# Altium PCB PCB1.PcbDoc (part 1 of 2)
Units mil, origin at the board's own origin, x right, y up, seen from the top; angles counter-clockwise.
Board outline 2362.2 x 2362.2 mil, 2 copper layers (Top Layer, Bottom Layer); 150 components, 103 nets, 538 pads, 377 vias.
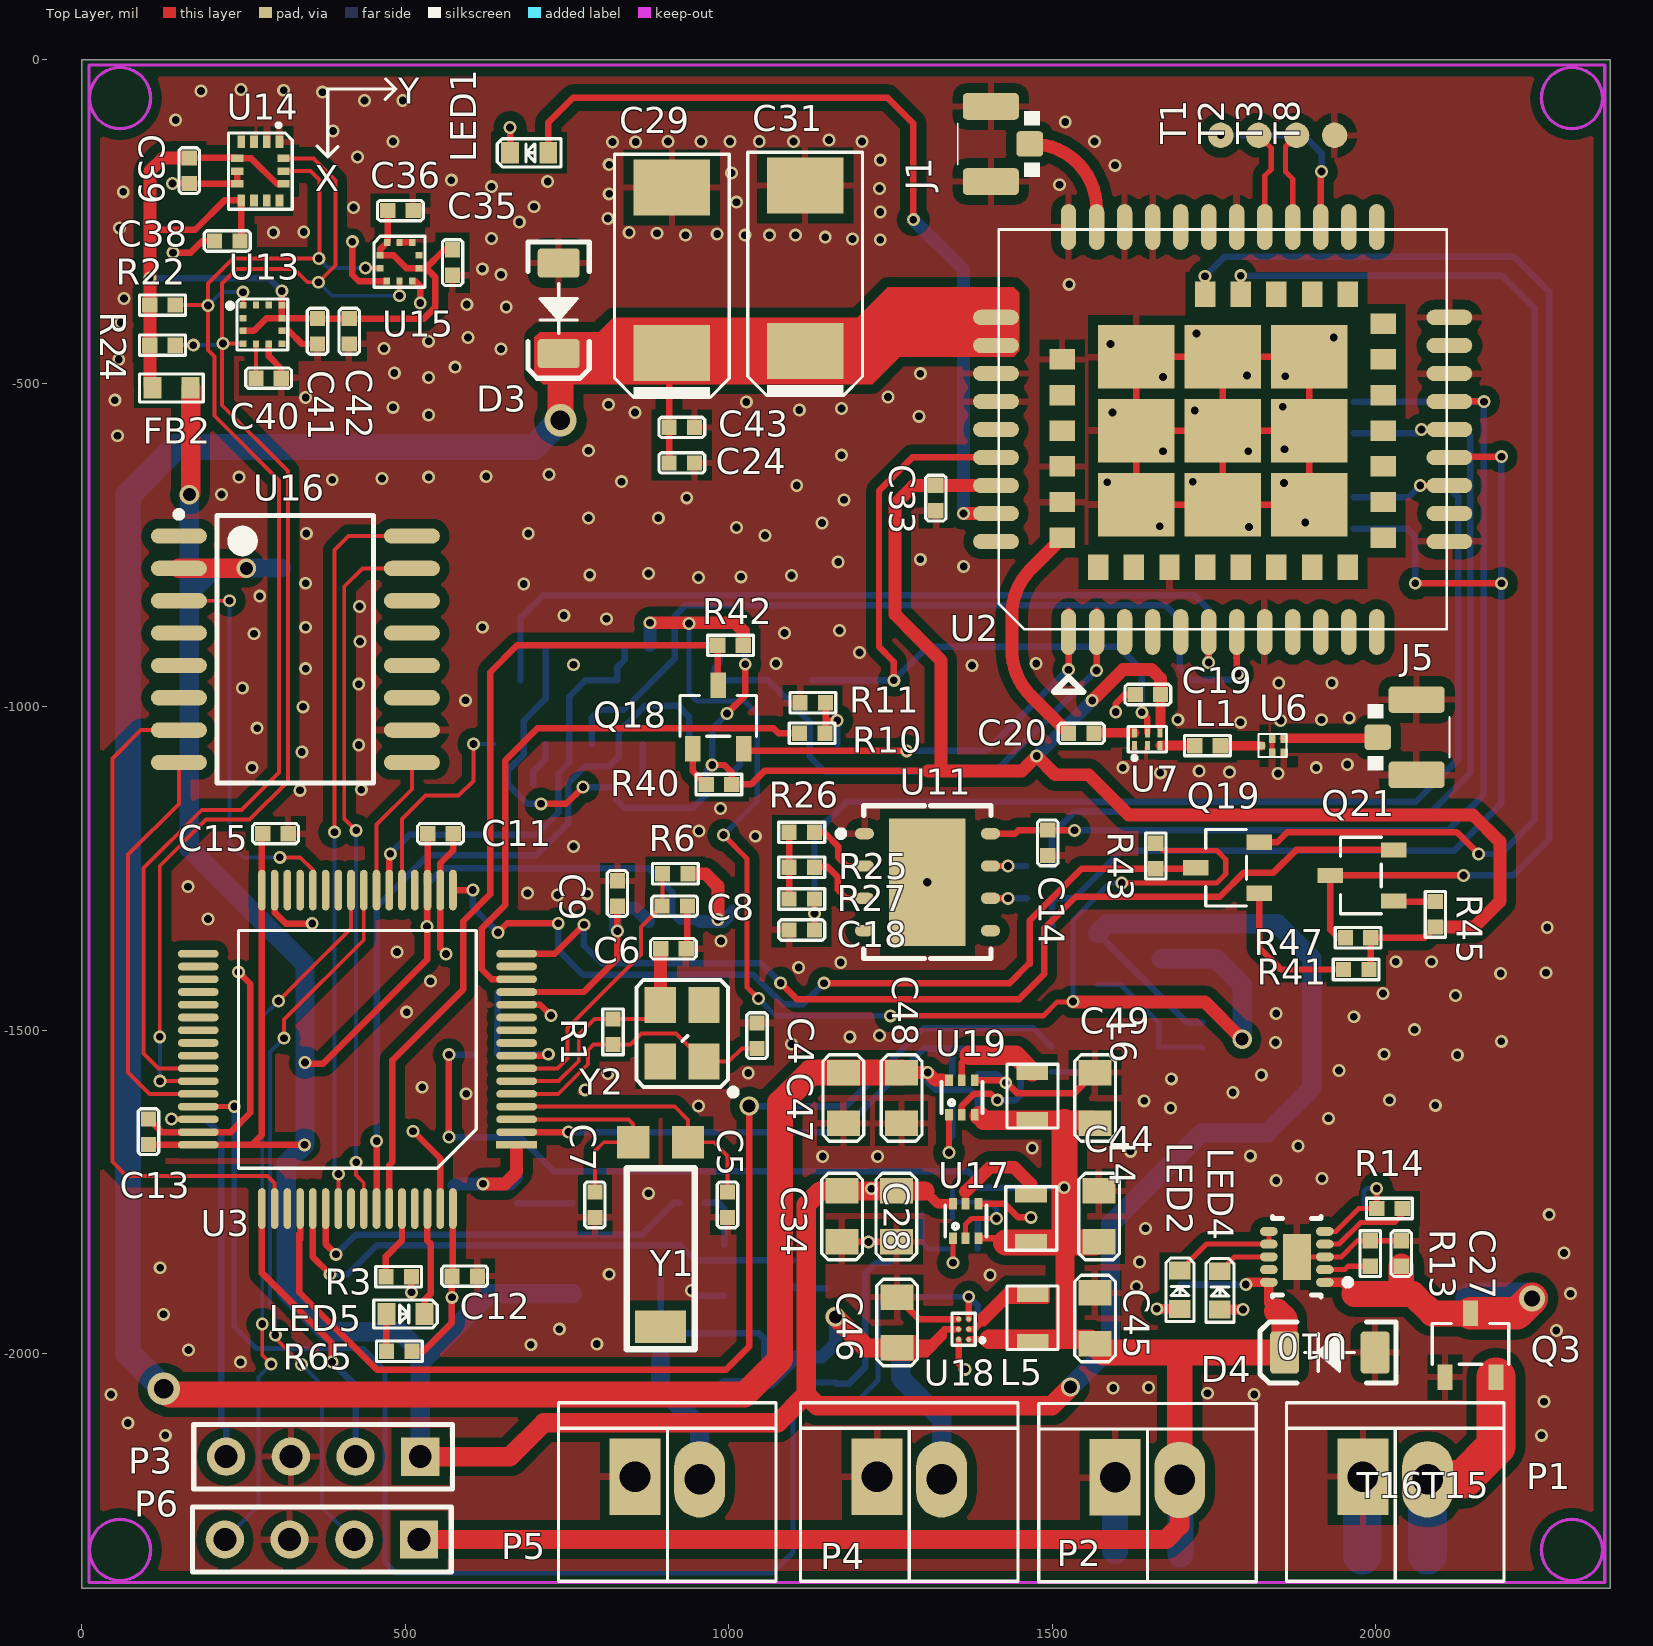
[diagram p0: Top Layer view]
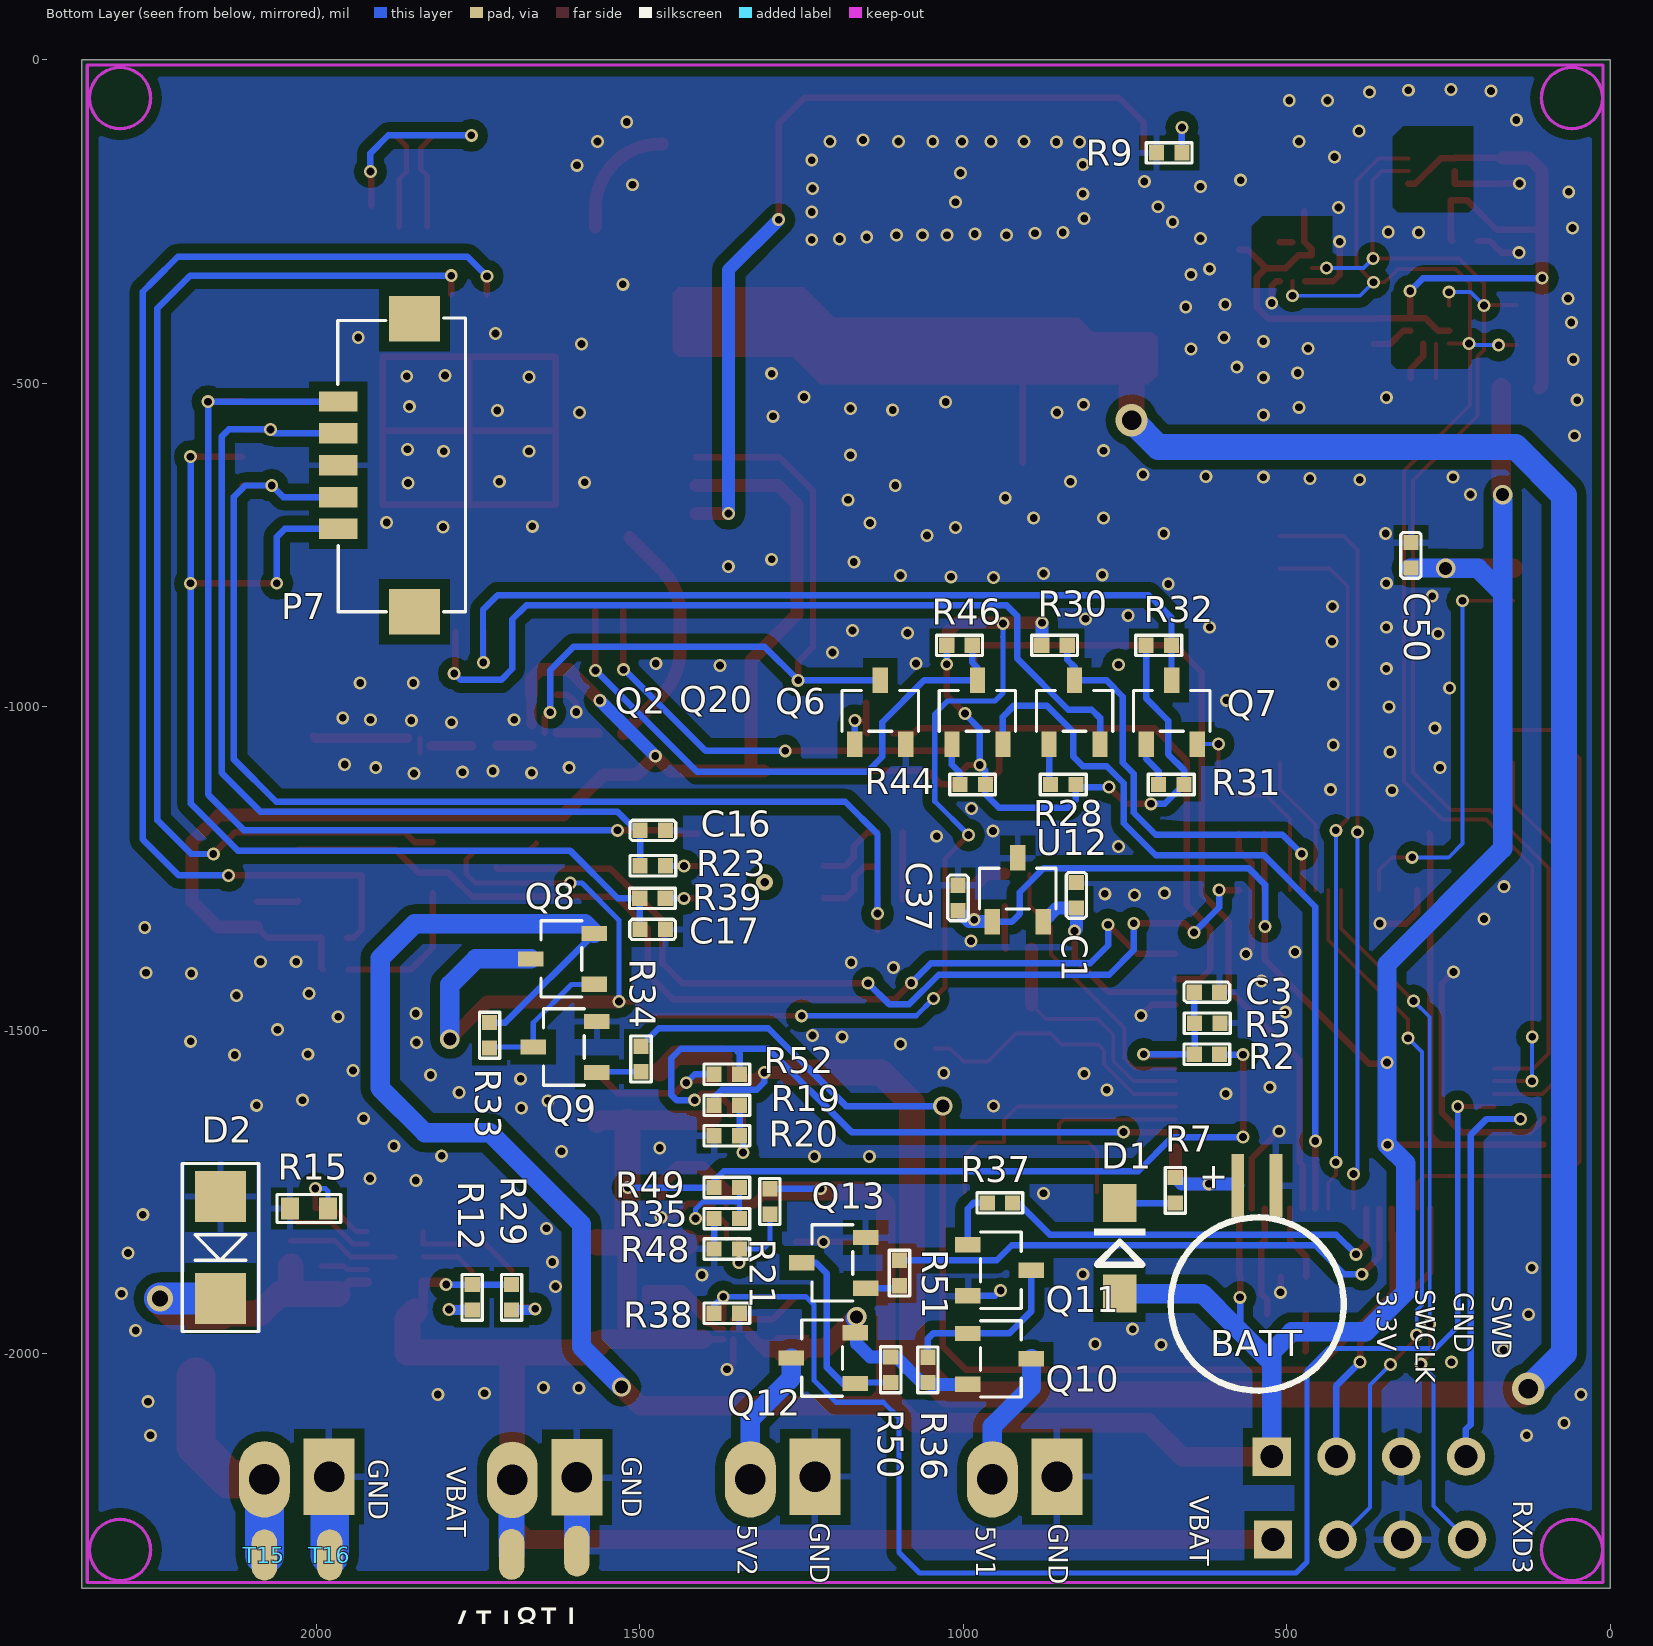
[diagram p1: Bottom Layer view, seen from below]

## Layer stack, top to bottom
Top Layer: signal copper 1.4
Dielectric: dielectric 12.6, FR-4, Dk 4.8
Bottom Layer: signal copper 1.4

## Board outline
0,-2362.2 0,0 2362.2,0 2362.2,-2362.2

## Design rules (kind name [scope] priority, off if disabled: settings)
Clearance [InPolygon  And InNet(AGND)] p1: gap=15
Clearance Clearance_1 [All] p2: gap=5
HoleToHoleClearance [All] p1: gap=5 allowstackedmicrovias=TRUE
MinimumSolderMaskSliver [All] p1: minsoldermaskwidth=1
PolygonConnect PolygonConnect_1 [IsVia  And InNet(AGND)] p1: connectstyle=Direct reliefconductorwidth=10 reliefentries=4 polygonreliefangle="90 Angle"
PolygonConnect [All] p2: connectstyle=Relief reliefconductorwidth=10 reliefentries=4 polygonreliefangle="90 Angle"
RoutingVias [All] p1: holewidth=28 width=50 viastyle="Through Hole" minholewidth=28 minwidth=50 maxholewidth=28 maxwidth=50
SilkToSilkClearance [All] p1: silktosilkclearance=5
SilkscreenOverComponentPads [All] p1: minsilkscreentomaskgap=1
SolderMaskExpansion [All] p1: expansion=4
Width [All] p1: maxlimit=200 minlimit=5 preferedwidth=10
24 further rules are at their usual default settings.

## Classes and differential pairs
component class sensors: C35 C36 C38 C39 C40 C41 C42 FB2 R22 R24 U13 U14 U15
component class power: C1 C27 C28 C34 C37 C44 C45 C46 C47 C48 C49 D2 D4 L4 L5 L6 LED2 LED4 P1 P2 P4 P5 Q3 Q8 Q9 Q10 Q11 Q12 Q13 R12 R13 R14 R15 R19 R20 R21 R29 R33 R34 R35 R36 R37 R38 R48 R49 R50 R51 R52 T15 T16 T17 T18 U10 U12 U17 U18 U19
component class GPS&&lte2: C10 C14 C16 C17 C18 C19 C20 C21 C24 C26 C29 C30 C31 C33 C43 D3 J1 J5 L1 LED1 P7 Q2 Q6 Q7 Q18 Q19 Q20 Q21 R8 R9 R10 R11 R17 R23 R25 R26 R27 R28 R30 R31 R32 R39 R40 R41 R42 R43 R44 R45 R46 R47 T1 T2 T3 T8 U6 U7 U11
component class CPU: BATT C3 C4 C5 C6 C7 C8 C9 C11 C12 C13 C15 C50 D1 LED5 P3 P6 R1 R2 R3 R5 R6 R7 R65 U3 U16 U? Y1 Y2
component class NBIOT: U2

## Components (designator, comment, footprint, x,y, rotation, side; value= is the part's Value field where it differs from the comment)
BATT "MS621FE" MS621FE 546,-1740 r90 bottom
C1 "0.1uF/25V" 0402c 825,-1311 r90 bottom
C3 "0.1uF/25v" 0402c 643,-1441 r180 bottom
C4 "22pF" 0402c 1043.62,-1488.58 r270 top
C5 "6pF" 0402c 998,-1750 r270 top
C6 "22pF" 0402c 934,-1374 r180 top
C7 "6pF" 0402c 793,-1750 r270 top
C8 "0.1uF/25V" 0402C 936,-1308 r180 top
C9 "0.1uF/25V" 0402C 827.76,-1268.82 r270 top
C11 "0.1uF/25V" 0402C 574,-1196 r180 top
C12 "0.1uF/25V" 0402C 611.42,-1879.96 r180 top
C13 "0.1uF/25V" 0402C 103,-1637 r270 top
C14 "0.1uF" 0402C 1493,-1229.88 r90 top
C15 "0.1uF/25V" 0402C 319,-1196 r180 top
C16 "10pF/NC" 0402C 1460,-1190.88 r0 bottom
C17 "10pF/NC" 0402C 1460.24,-1344 r0 bottom
C18 "10pF/NC" 0402C 1093,-1345 r0 top
C19 "0.1uF" 0402C 1628,-981 r0 top
C20 "36pF" 0402c 1525,-1041 r0 top
C24 "10pF" 0402C 947,-623 r180 top
C27 "1uF/25V" 0402C 2039.37,-1864.76 r90 top
C28 "22uF/10V" 0805C 1259,-1748.31 r270 top
C29 "1000uF" 7343 912,-453 r90 top
C31 "1000uF" 7343 1118,-450 r90 top
C33 "0.1uF" 0402C 1320,-697 r90 top
C34 "22uF/10V" 0805C 1175,-1748.31 r270 top
C35 "0.1uF/25V" 0402C 573,-333 r90 top
C36 "0.1uF/25V" 0402C 512,-233 r180 top
C37 "0.1uF/25V" 0402c 1008,-1315 r90 bottom
C38 "0.1uF/25V" 0402C 205,-280 r0 top
C39 "0.1uF/25V" 0402C 166,-191 r90 top
C40 "22pF" 0402c 269,-492 r0 top
C41 "0.1uF/25V" 0402C 364.25,-439.19 r90 top
C42 "0.1uF/25V" 0402C 413.25,-439.19 r90 top
C43 "33pF" 0402C 947,-568 r180 top
C44 "22uF/10V" 0805C 1572.42,-1827.05 r90 top
C45 "22uF/10V" 0805C 1566,-1984.74 r90 top
C46 "22uF/10V" 0805C 1260,-1991 r90 top
C47 "22uF/10V" 0805C 1177,-1565.26 r270 top
C48 "22uF/10V" 0805C 1267,-1565.26 r270 top
C49 "22uF/10V" 0805C 1566,-1644 r90 top
C50 "0.1uF/25V" 0402C 307.93,-746.08 r270 bottom
D1 "1N4148" DIODE_SOP 758,-1907 r90 bottom
D2 "SMAJ12CA" SMA 2148,-1757 r270 bottom
D3 "DIODE_SCHOTTKY_0" LL-34(D1206) 737,-384 r270 top
D4 "DIODE_SCHOTTKY_0" LL-34(D1206) 1929,-1998 r180 top
FB2 "10R/1A" 0603R 168,-507 r180 top
J1 "IPEX" RF-UFL 1405,-130 r90 top
J5 "IPEX" RF-UFL 2063,-1047 r270 top
L1 "LQW15A" 0402R 1720,-1060 r0 top
L4 "SRP4020TA-1R0M" L2520 1466.99,-1753.05 r270 top
L5 "SRP4020TA-2R2M" L2520 1469.74,-1982 r90 top
L6 "SRP4020TA-1R0M" L2520 1469,-1564 r270 top
LED1 "LED" 0603LED 720.94,-143.75 r180 top
LED2 "LED" 0603LED 1697.2,-1930.51 r90 top
LED4 "LED" 0603LED 1759,-1931.4 r90 top
LED5 "LED" 0603LED 470.67,-1938.58 r0 top
P1 "Header 2" 2X2.54MMZ 1980,-2190 r0 top
P2 "Header 2" 2X2.54MMZ 1597,-2191 r0 top
P3 "Header 4" HDR1X4 523,-2159 r180 top
P4 "Header 2" 2X2.54MMZ 1229,-2190 r0 top
P5 "Header 2" 2X2.54MMZ 855,-2190 r0 top
P6 "Header 4" HDR1X4 521,-2287 r180 top
P7 "Header 5" 5×1.25mmSMT 1966,-725 r90 bottom
Q2 "MMBT3904" SOT23-3 1167.5,-1057.51 r270 bottom
Q3 "Si2369DS" sot23-3 2107,-2036 r270 top
Q6 "MMBT3904" SOT23-3 867.17,-1057.51 r270 bottom
Q7 "MMBT3904" SOT23-3 717,-1057.51 r270 bottom
Q8 "Si2369DS" sot23-3 1570,-1429 r180 bottom
Q9 "S8050" SOT23-3 1566,-1565.26 r180 bottom
Q10 "Si2369DS" sot23-3 992.87,-1968.46 r0 bottom
Q11 "S8050" SOT23-3 992.87,-1831.57 r0 bottom
Q12 "Si2369DS" sot23-3 1167,-2046 r180 bottom
Q13 "S8050" SOT23-3 1150.83,-1898.82 r180 bottom
Q18 "MMBT3904" SOT23-3 944.26,-1065 r270 top
Q19 "MMBT3904" SOT23-3 1820,-1288 r0 top
Q20 "MMBT3904" SOT23-3 1017.33,-1057.51 r270 bottom
Q21 "MMBT3904" SOT23-3 2028,-1300 r0 top
R1 "1MR" 0402R 821,-1522 r90 top
R2 "10K/1%" 0402R 603.63,-1537 r0 bottom
R3 "100K" 0402R 470,-1881 r0 top
R5 "10K/1%" 0402R 642.37,-1489 r180 bottom
R6 "10K" 0402R 937,-1258 r180 top
R7 "470" 0402R 672,-1767 r90 bottom
R9 "1K" 0402R 661.88,-143.75 r0 bottom
R10 "4.7K" 0402R 1148.51,-1040.78 r180 top
R11 "47K" 0402R 1149.51,-993.78 r180 top
R12 "1K/1%" 0402R 1759,-1893 r270 bottom
R13 "3.95K/1%" 0402R 1991.37,-1864.76 r90 top
R14 "21.5k/1%" 0402R 2001.37,-1775.39 r0 top
R15 "RTH103AT" 0603R 2040.74,-1775.39 r180 bottom
R19 "534K/1%" 0402R 1385,-1616 r180 bottom
R20 "100K/1%" 0402R 1385,-1663 r180 bottom
R21 "400K/1%" 0402R 1298.74,-1744.92 r270 bottom
R22 "4.7K" 0402R 105.01,-379 r0 top
R23 "10R" 0402R 1499.37,-1245.63 r180 bottom
R24 "4.7K" 0402R 144.38,-441 r180 top
R25 "0R" 0402R 1132.41,-1248 r180 top
R26 "0R" 0402R 1132.41,-1194 r180 top
R27 "10R" 0402R 1132.41,-1297 r180 top
R28 "4.7K" 0402R 865,-1120 r180 bottom
R29 "1K/1%" 0402R 1698,-1893 r270 bottom
R30 "10K" 0402R 839,-905 r0 bottom
R31 "4.7K" 0402R 698,-1120 r180 bottom
R32 "4.7K" 0402R 678,-905 r0 bottom
R33 "4K7" 0402R 1732,-1488 r270 bottom
R34 "4K7" 0402R 1498,-1564 r90 bottom
R35 "10K/1%" 0402R 1385,-1791 r180 bottom
R36 "4K7" 0402R 1054.45,-2044.49 r90 bottom
R37 "4K7" 0402R 962.95,-1766.81 r180 bottom
R38 "10K/1%" 0402R 1345.63,-1937.28 r0 bottom
R39 "10R" 0402R 1500,-1296 r180 bottom
R40 "4.7K" 0402R 965,-1120 r0 top
R41 "4.7K" 0402R 1950,-1406 r0 top
R42 "10K" 0402R 983,-905 r0 top
R43 "10K" 0402R 1660,-1250.31 r90 top
R44 "4.7K" 0402R 1005,-1120 r180 bottom
R45 "4.7K" 0402R 2092,-1301 r270 top
R46 "4.7K" 0402R 986,-905 r0 bottom
R47 "4.7K" 0402R 1953,-1357 r0 top
R48 "100K/1%" 0402R 1385,-1838 r180 bottom
R49 "13K/1%" 0402R 1385,-1743 r180 bottom
R50 "4K7" 0402R 1112,-2005 r270 bottom
R51 "4K7" 0402R 1098.46,-1894.92 r90 bottom
R52 "10K/1%" 0402R 1385,-1568 r180 bottom
R65 "1K" 0402R 471,-1996 r0 top
T1 "TPD" TPD 1760.27,-116.69 r90 top
T2 "TPD" TPD 1818.94,-116.69 r90 top
T3 "TPD" TPD 1877.6,-116.69 r90 top
T8 "TPD" TPD 1936.27,-116.69 r90 top
T15 "TPD" TP#1 2080,-2311 r90 top
T16 "TPD" TP#1 1979,-2311 r90 top
T17 "TPD" TP#2 1698,-2310 r270 bottom
T18 "TPD" TP#2 1597,-2305 r270 bottom
U2 "SIM7080G" SIM868 1525.16,-884.25 r90 top
U3 "stm32l412r8t6" LQFP-64 672,-1677 r180 top
U6 "SAFFB1G56KB0F0A" SAFFB1G56KB0F0A 1823,-1060 r0 top
U7 "AW5005DNR" AW5005 1647,-1050 r90 top
U10 "bq24210" QFN50P200X300X80-10N 1878,-1850.19 r180 top
U11 "SLI76CF3600P" QFN127P500X600X80-8N 1307,-1271 r0 top
U12 "REF3025AIDBZR" SOT23-3 955,-1332 r270 bottom
U13 "LIS2MDL" LIS2MDL 279,-409 r0 top
U14 "LSM6DS3TR" LSM6DS3TR-C 276,-172 r270 top
U15 "BMP388" BMP388 491,-312 r90 top
U16 "MX25L51245GMI-10G" SOP127P1030X239-16N 330,-911 r0 top
U17 "TPS61023" SOT563-6 1366,-1795 r0 top
U18 "TPS610997YFFR" TPS610997YFFR 1363,-1962 r180 top
U19 "TPS61023" SOT563-6 1360,-1604 r0 top
Y1 "MC-146 32.768K/6pF" 32.768K 852,-1673 r0 top
Y2 "8MHz" OSCILLATOR-3.2X2.5 928,-1505 r90 top

## Footprints (in the part's own frame and the unit in brackets; to place one, negate y for a bottom-side part, rotate by r counter-clockwise, add the part's x,y. Pads: shape width x height; smd on the part's side, far side on the other; paste and mask are expansions set on the pad)
2X2.54MMZ [mm]
  rect 2x3 hole 1.2: 1(0,0)
  oval 2x3 hole 1.2: 2(2.54,-0.1)
  silkscreen extent -3,-4.1 5.54,2.9
5×1.25mmSMT [mm]
  rect 1.8x2 smd: 0(-3.25,-3) 0(8.25,-3)
  rect 0.8x1.5 smd: 1(0,0) 2(1.25,0) 3(2.5,0) 4(3.75,0) 5(5,0)
  round 0.5 on Bottom Overlay: ""(-0.875,0.432)
  silkscreen extent -3.25,-5 8.28,0.02
32.768K [mil]
  rect 50x50 smd: 1(0,0) 2(85,0)
  rect 78.74x50 smd: 3(42.13,-285)
  silkscreen extent -10,-320 95,-40
0402c [mm]
  rect 0.6x0.6 smd: 1(0,0) 2(1,0)
  silkscreen extent -0.4,-0.4 1.4,0.4
0402C [mm]
  rect 0.6x0.6 smd: 1(0,0) 2(1,0)
  silkscreen extent -0.4,-0.4 1.4,0.4
0402R [mm]
  rect 0.6x0.6 smd: 1(0,0) 2(1,0)
  silkscreen extent -0.4,-0.4 1.4,0.4
0603LED [mm]
  rect 0.7x0.85 smd: 1(0,0) 2(1.5,0)
  silkscreen extent -0.5,-0.55 2,0.55
0603R [mm]
  rect 0.7x0.85 smd: 1(0,0) 2(1.5,0)
  silkscreen extent -0.5,-0.55 2,0.55
0805C [mm]
  rect 1x1.3 smd: 1(0,0) 2(2,0)
  silkscreen extent -0.7,-0.8 2.7,0.8
7343 [mm]
  rect 2.2x3 smd: 1(0,0) 2(6.5,0)
  silkscreen extent -1.75,-2.25 7.8,2.25
AW5005 [mm]
  rect 0.35x0.2 smd: 1(-0.25,0.5) 2(-0.25,0) 3(-0.25,-0.5) 4(0.25,-0.5) 5(0.25,0) 6(0.25,0.5)
  silkscreen extent -0.77,-0.75 0.5,0.75
BMP388 [mm]
  rect 0.25x0.275 smd: 1(0.25,0.763) 2(-0.25,0.763) 6(-0.25,-0.763) 7(0.25,-0.763)
  rect 0.275x0.25 smd: 3(-0.763,0.5) 4(-0.763,0) 5(-0.763,-0.5) 8(0.763,-0.5) 9(0.763,0) 10(0.763,0.483)
  silkscreen extent -1,-1 1,1
DIODE_SOP [mm]
  rect 1.5x1.3 smd: 1(0,0) 2(3.556,0)
  silkscreen extent 1.14,-1.02 2.56,1.02
HDR1X4 [mm] "Connector; Header; 4 Position"
  rect 1.5x1.5 hole 0.9: 1(0,0)
  round 1.5 hole 0.9: 2(2.54,0) 3(5.08,0) 4(7.62,0)
  silkscreen extent -1.27,-1.27 8.89,1.27
L2520 [mm]
  rect 0.65x1.25 smd: 1(0,0) 2(1.9,0)
  silkscreen extent -0.29,-0.99 2.21,1.01
LIS2MDL [mm]
  rect 0.275x0.25 smd: 1(-0.763,0.75) 2(-0.763,0.25) 3(-0.763,-0.25) 4(-0.763,-0.75) 7(0.763,-0.75) 8(0.763,-0.25) 9(0.763,0.25) 10(0.763,0.75)
  rect 0.25x0.275 smd: 5(-0.25,-0.763) 6(0.25,-0.763) 11(0.25,0.763) 12(-0.25,0.763)
  silkscreen extent -1.35,-1 1,1
LL-34(D1206) [mil]
  rrect25% 45x65 smd: 1(-70,0) 2(70,0)
  silkscreen extent -102,-47 108,47, body extent -70,-28 68,30, height 56
LQFP-64 [mm]
  rect 1.6x0.3 smd: 1(0,0)
  oval 1.6x0.3 smd: 2(0,-0.5) 3(0,-1) 4(0,-1.5) 5(0,-2) 6(0,-2.5) 7(0,-3) 8(0,-3.5) 9(0,-4) 10(0,-4.5) 11(0,-5) 12(0,-5.5) 13(0,-6) 14(0,-6.5) 15(0,-7) 16(0,-7.5) 33(12.5,-7.5) 34(12.5,-7) 35(12.5,-6.5) 36(12.5,-6) 37(12.5,-5.5) 38(12.5,-5) 39(12.5,-4.5) 40(12.5,-4) 41(12.5,-3.5) 42(12.5,-3) 43(12.5,-2.5) 44(12.5,-2) 45(12.5,-1.5) 46(12.5,-1) 47(12.5,-0.5) 48(12.5,0)
  oval 0.3x1.6 smd: 17(2.5,-10) 18(3,-10) 19(3.5,-10) 20(4,-10) 21(4.5,-10) 22(5,-10) 23(5.5,-10) 24(6,-10) 25(6.5,-10) 26(7,-10) 27(7.5,-10) 28(8,-10) 29(8.5,-10) 30(9,-10) 31(9.5,-10) 32(10,-10) 49(10,2.5) 50(9.5,2.5) 51(9,2.5) 52(8.5,2.5) 53(8,2.5) 54(7.5,2.5) 55(7,2.5) 56(6.5,2.5) 57(6,2.5) 58(5.5,2.5) 59(5,2.5) 60(4.5,2.5) 61(4,2.5) 62(3.5,2.5) 63(3,2.5) 64(2.5,2.5)
  silkscreen extent 1.59,-8.41 10.91,0.91
LSM6DS3TR-C [mm]
  rect 0.48x0.3 smd: 1(-1.15,0.75) 2(-1.15,0.25) 3(-1.15,-0.25) 4(-1.15,-0.75) 8(1.15,-0.75) 9(1.15,-0.25) 10(1.15,0.25) 11(1.15,0.75)
  rect 0.3x0.48 smd: 5(-0.5,-0.91) 6(0,-0.91) 7(0.5,-0.91) 12(0.5,0.91) 13(0,0.91) 14(-0.5,0.91)
  silkscreen extent -1.83,-1.25 1.5,1.25
MS621FE [mm]
  rect 2.5x0.5 smd: 1(0,-0.749) 2(0,0.749)
  silkscreen extent -8.05,-3.41 -1.25,3.39
OSCILLATOR-3.2X2.5 [mil] "OSCILLATOR-3.2X2.5"
  rect 56x48 smd: 1(-43.31,-33.46) 2(44,-33.46) 3(44,34) 4(-43.31,34)
  silkscreen extent -95,-83 83,71
QFN50P200X300X80-10N [mm] "QFN, 10-Leads, Body 2.9x1.9mm (max), Pitch 0.50mm, IPC Medium Density"
  oval 0.7x0.35 smd: 1(-1.1,1) 2(-1.1,0.5) 3(-1.1,0) 4(-1.1,-0.5) 5(-1.1,-1) 6(1.1,-1) 7(1.1,-0.5) 8(1.1,0) 9(1.1,0.5) 10(1.1,1)
  rect 1.1x1.8 smd: 11(0,0)
  silkscreen extent -2.13,-1.58 0.95,1.57, body extent -0.95,-1.45 0.95,1.45, height 0.8
QFN127P500X600X80-8N [mm] "QFN, 8-Leads, Body 6.0x5.0mm (max), Pitch 1.27mm, IPC Medium Density"
  oval 0.75x0.45 smd: 1(-2.475,1.905) 2(-2.475,0.635) 3(-2.475,-0.635) 4(-2.475,-1.905) 5(2.475,-1.905) 6(2.475,-0.635) 7(2.475,0.635) 8(2.475,1.905)
  rect 3x5 smd: 9(0,0)
  silkscreen extent -3.52,-3 2.5,3
RF-UFL [mm]
  rrect30% 1x1.05 smd: 1(0,-1.525)
  rrect30% 1.05x2.2 smd: 2(-1.475,0) 2(1.475,0)
  silkscreen extent -1.3,-1.93 1.3,1.3, body extent -1.7,-1.55 1.7,1.55, height 1.25
SAFFB1G56KB0F0A [mm]
  rect 0.3x0.3 smd: 1(0,0)
  rect 0.25x0.35 smd: 2(0.425,-0.288) 5(0.425,0.288)
  rect 0.3x0.35 smd: 3(0.9,-0.288) 4(0.9,0.288)
  silkscreen extent -0.1,-0.44 1,0.46
SIM868 [mm]
  oval 1.8x0.6 smd: 1(0,0) 2(0,-1.1) 3(0,-2.2) 4(0,-3.3) 5(0,-4.4) 6(0,-5.5) 7(0,-6.6) 8(0,-7.7) 9(0,-8.8) 10(0,-9.9) 11(0,-11) 12(0,-12.1) 22(15.9,-12.1) 23(15.9,-11) 24(15.9,-9.9) 25(15.9,-8.8) 26(15.9,-7.7) 27(15.9,-6.6) 28(15.9,-5.5) 29(15.9,-4.4) 30(15.9,-3.3) 31(15.9,-2.2) 32(15.9,-1.1) 33(15.9,0)
  oval 0.6x1.8 smd: 13(3.55,-14.95) 14(4.65,-14.95) 15(5.75,-14.95) 16(6.85,-14.95) 17(7.95,-14.95) 18(9.05,-14.95) 19(10.15,-14.95) 20(11.25,-14.95) 21(12.35,-14.95) 34(12.35,2.85) 35(11.25,2.85) 36(10.15,2.85) 37(9.05,2.85) 38(7.95,2.85) 39(6.85,2.85) 40(5.75,2.85) 41(4.65,2.85) 42(3.55,2.85)
  rect 1x0.8 smd: 43(2.549,-1.159) 44(2.549,-2.559) 45(2.549,-3.959) 46(2.549,-5.359) 47(2.549,-6.759) 48(2.549,-8.159) 49(2.549,-9.559) 50(2.549,-10.959) 58(13.251,-10.959) 59(13.251,-9.559) 60(13.251,-8.159) 61(13.251,-6.759) 62(13.251,-5.359)
  rect 0.8x1 smd: 51(3.7,-12.359) 52(5.1,-12.359) 53(6.5,-12.359) 54(7.9,-12.359) 55(9.3,-12.359) 56(10.7,-12.359) 57(12.1,-12.359) 63(10.7,0.25) 64(9.3,0.25) 65(7.9,0.25) 66(6.5,0.25) 67(5.1,0.25) 68(3.7,0.25)
  rect 2.5x3 smd: 69(5,-2.65) 70(5,-6.05) 71(5,-9.45) 72(7.9,-9.45) 73(10.8,-9.45) 74(10.8,-6.05) 75(10.8,-2.65) 76(7.9,-2.65) 77(7.9,-6.05)
  silkscreen extent -2.35,-14.85 15.8,2.75
SMA [mm]
  rect 2x2 smd: 1(0,0) 2(4,0)
  silkscreen extent -1.3,-1.5 5.3,1.5
SOP127P1030X239-16N [mm] "SOP, 16-Leads, Body 10.5x7.6mm (max), Pitch 1.27mm, IPC Medium Density"
  oval 2.2x0.6 smd: 1(-4.575,4.445) 2(-4.575,3.175) 3(-4.575,1.905) 4(-4.575,0.635) 5(-4.575,-0.635) 6(-4.575,-1.905) 7(-4.575,-3.175) 8(-4.575,-4.445) 9(4.575,-4.445) 10(4.575,-3.175) 11(4.575,-1.905) 12(4.575,-0.635) 13(4.575,0.635) 14(4.575,1.905) 15(4.575,3.175) 16(4.575,4.445)
  silkscreen extent -4.7,-5.25 3.08,5.42, body extent -3.8,-5.25 3.8,5.25, height 2.39
SOT23-3 [mm]
  rect 1x0.6 smd: 1(0,0) 2(0,2) 3(-2.5,1)
  silkscreen extent -2.1,-0.5 -0.5,2.5
sot23-3 [mm]
  rect 1x0.6 smd: 1(0,0) 2(0,2) 3(-2.5,1)
  silkscreen extent -2.1,-0.5 -0.5,2.5
SOT563-6 [mil] "SOT563-6"
  rect 12x18 smd: 1(-19.68,-26.57) 2(0,-26.57) 3(20,-26.57) 4(20,27) 5(0,27) 6(-19.68,27)
  silkscreen extent -31,-24 32,24
TP#1 [mm]
  oval 2x1 smd far side: 1(0,0)
TP#2 [mm]
  oval 2x1 smd: 1(0,0)
TPD [mm]
  round 1 smd: 1(0,0)
TPS610997YFFR [mm]
  round 0.2 smd: A1(-0.2,0.4) A2(0.2,0.4) B1(-0.2,0) B2(0.2,0) C1(-0.2,-0.4) C2(0.2,-0.4)
  silkscreen extent -0.77,-0.63 0.46,0.63

## Part data
BATT: library part SBatery
C1 C20 C37: library part Cap, "Capacitor"
C3 C4 C5 C6 C7 C8 C9 C11 C12 C13 C14 C15 C16 C17 C18 C19 C24 C27 C28 C33 C34 C35 C36 C38 C39 C40 C41 C42 C43 C44 C45 C46 C47 C48 C49 C50: library part CAP, "Capacitor"
C29 C31: library part "Cap Pol3", "Polarized Capacitor (Surface Mount)"
D1: library part D
D2: library part DIODE_SCHOTTKY_0
FB2: library part INDUCTOR1
J1 J5: library part ANT
L1 L4 L5 L6: library part INDUCTOR_1
P1 P2 P4 P5: "Header, 2-Pin"
P3 P6: "Header, 4-Pin"
P7: "Header, 5-Pin"
Q2 Q9 Q11 Q13: library part 2N1069_1
Q3 Q8 Q10 Q12: library part NCE4060K, "NMOSFET"
Q6 Q7 Q18 Q19 Q20 Q21: library part NPN
R1: library part Res3, "Resistor"
R2 R5 R9 R10 R11 R12 R13 R14 R15 R19 R20 R21 R22 R23 R24 R25 R26 R27 R28 R29 R30 R31 R32 R33 R34 R35 R36 R37 R38 R39 R40 R41 R42 R43 R44 R45 R46 R47 R48 R49 R50 R51 R52 R65: library part RES1
R3 R6 R7: library part Res2, "Resistor"
U2: library part SIM868E/SIM868
U3: library part STM32L100R8T6, "ARM Cortex-M3 32-bit MCU, 64 KB Flash, 8 KB Internal RAM, 51 I/Os, 64-pin LQFP, -40 to 85 degC, Tray"
U6: library part SAFFB1G56KBOFA
U10: library part bq2410
U12: library part REF3012
Y1 Y2: library part XTAL, "Crystal Oscillator"

## Via types
v1: diameter 20, hole 12, Top Layer to Bottom Layer, tented both sides, 367 vias
v2: diameter 30, hole 20, Top Layer to Bottom Layer, tented both sides, 6 vias
v3: diameter 50, hole 30, Top Layer to Bottom Layer, tented both sides, 2 vias
v4: diameter 40, hole 25, Top Layer to Bottom Layer, tented both sides, 1 vias
v5: diameter 25.98, hole 12.99, Top Layer to Bottom Layer, tented top, 1 vias

## Nets (pads, with @x,y where several pads share a name; then routed paths per layer and width w, separated by ;. In a path a pad name is that pad's centre, name@x,y a point inside that pad or via, vN(x,y) a via of type N, cw(c..) or ccw(c..) an arc to the next point about the centre after c; other vN are vias at no path point)
2.5V: C1.1 C9.2 U3.13 U12.2 | length 354.3
  Top Layer w10: U3.13@672,-1440.78 775.72,-1440.78 827.76,-1388.74 v1(827.76,-1346.34) C9.2@827.76,-1308.19
  Bottom Layer w20: v1(827.76,-1346.34) 825,-1343.58 C1.1@825,-1311 855.26,-1311 U12.2@876.26,-1332
AGND: BATT.1 C1.2 C3.2 C4.1 C5.2 C6.1 C7.2 C8.1 C9.1 C11.1 C12.1 C13.1 C14.1 C15.1 C16.1 C17.1 C18.1 C19.1 C24.1 C27.2 C28.2 C29.2 C31.2 C33.1 C34.2 C35.1 C36.1 C37.2 C38.1 C39.1 C40.2 C41.1 C42.1 C43.1 C44.2 C45.2 C46.2 C47.2 C48.2 C49.2 C50.1 D2.1 D3.1 D4.1 J1.2 J5.2 P1.1 P2.1 P3.3 P4.1 P5.1 P6.3 P7.3 Q2.2 Q3.1 Q9.2 Q11.2 Q13.2 R3.2 R5.2 R9.2 R11.2 R13.2 R15.1 R20.1 R35.1 R38.1 R48.1 R52.1 T8.1 T16.1 T18.1 U2.8 U2.13 U2.19 U2.21 U2.27 U2.30 U2.31 U2.33 U2.36 U2.37 U2.45 U2.63 U2.66 U2.67 U2.69 U2.70 U2.71 U2.72 U2.73 U2.74 U2.75 U2.76 U2.77 U3.12 U3.18 U3.31 U3.47 U3.63 U6.2 U6.3 U6.5 U7.1 U7.2 U10.3 U10.11 U11.1 U12.3 U13.6 U13.8 U14.1 U14.2 U14.3 U14.6 U14.7 U15.3 U15.5 U15.8 U15.9 U16.10 U17.4 U18.A2 U18.C2 U19.4 Y2.2 Y2.4 | length 4147.4
  Top Layer w8: U6.2@1839.73,-1071.32 U6.5@1839.73,-1048.68 ; U10.11@1878,-1850.19 U10.3@1921.31,-1850.19 1946.66,-1850.19 1971.46,-1825.39 R13.2@1991.37,-1825.39 C27.2@2039.37,-1825.39
  Top Layer w10: C13.1@103,-1637 123.32,-1657.32 U3.47@179.87,-1657.32 230.68,-1657.32 260.47,-1627.53 260.47,-1428.19 v1(242.28,-1410) ; v1(140,-191) C39.1@166,-191 166.68,-191.68 U14.7@240.17,-191.68 U14.6@240.17,-172 ; v1(141,-298) 168,-298 186,-280 C38.1@205,-280 ; U13.6@288.84,-439.02 288.84,-457.84 308.37,-477.37 C40.2@308.37,-492 ; U3.31@297.98,-1283.3 297.98,-1317.98 315,-1335 v1(356,-1335) ; U13.8@309.02,-418.84 319.84,-418.84 340.19,-439.19 C41.1@364.25,-439.19 ; v1(418.02,-280.98) 418.02,-332.04 428,-342.02 U15.3@471.32,-342.02 ; U15.9@491,-281.98 U15.8@510.68,-281.98 ; v1(509.37,-1905) R3.2@509.37,-1881 ; U15.5@510.68,-342.02 516.02,-342.02 523,-349 523,-361 v1(523,-376) ; v1(512,-1656) 553.89,-1697.89 U3.63@553.89,-1775.43 ; v1(563,-1382) 553.89,-1372.89 U3.18@553.89,-1283.3 553.89,-1241.68 574,-1221.57 C11.1@574,-1196 ; U3.12@672,-1460.46 708.46,-1460.46 v1(725,-1477) ; C6.1@934,-1374 936,-1372 C8.1@936,-1308 ; C34.2@1175,-1827.05 C28.2@1259,-1827.05 ; C46.2@1260,-1912.26 1293.99,-1946.25 U18.C2@1355.13,-1946.25 ; U18.A2@1355.13,-1977.75 1355.13,-2014.13 v1(1365,-2024) ; U19.4@1380,-1577 1425.41,-1577 1445.41,-1597 1534.26,-1597 C49.2@1566,-1565.26 ; U17.4@1386,-1768 1404,-1768 ; 1419,-1768 1404,-1768 ; v1(1467,-1789) 1447,-1789 1426,-1768 1404,-1768 ; v1(1598,-1008) 1598,-995 1612,-981 C19.1@1628,-981 ; U2.76@1629.49,-573.23 U2.75@1629.49,-459.06 U2.74@1763.35,-459.06 ; U2.76@1629.49,-573.23 U2.69@1629.49,-687.4 U2.70@1763.35,-687.4 ; U2.76@1629.49,-573.23 U2.77@1763.35,-573.23 ; U2.70@1763.35,-687.4 U2.77@1763.35,-573.23 ; U2.70@1763.35,-687.4 U2.71@1897.21,-687.4 U2.72@1897.21,-573.23 ; U2.77@1763.35,-573.23 U2.74@1763.35,-459.06 ; U2.77@1763.35,-573.23 U2.72@1897.21,-573.23 ; U2.74@1763.35,-459.06 U2.73@1897.21,-459.06 U2.72@1897.21,-573.23
  Bottom Layer w10: v1(942,-1902) 950.32,-1910.32 Q11.2@992.87,-1910.32 ; R48.1@1385,-1838 R35.1@1385,-1791 ; R52.1@1385,-1568 1415,-1568 v1(1428,-1581)
  Bottom Layer w40: T18.1@1597,-2305 P2.1@1597,-2191
  Bottom Layer w60: T16.1@1979,-2311 1979,-2191 P1.1@1980,-2190
  other v1: 129,-2126 2256,-2126 71,-2107 2260,-2074 45,-2063 1812,-2063 1740,-2061 1594,-2053 1649,-2052 245,-2013 165,-1994 694,-1986 796,-1985 2279,-1964 738,-1962 126,-1939 2301,-1907 1630,-1896 1404,-1878 815,-1877 121,-1867 1635,-1858 2291,-1844 1216,-1827.05 1644,-1806 2268,-1785 876,-1752 1846,-1732 1917,-1729 1145,-1695 1230,-1695 1806,-1694 1621,-1687 1469,-1682 1880,-1679 1927,-1636 1683,-1620 953,-1617 2092,-1616 1642,-1609 2021,-1608 594,-1598 1779,-1596 778,-1592 526,-1588 1684,-1575 1823,-1569 813,-1567 1030,-1566 1943,-1562 2126,-1538 2013,-1537 1097,-1521 1845,-1519 2194,-1517 1187,-1510 1233,-1508 2060,-1499 1966,-1479 1846,-1474 502,-1472 2123,-1446 2011,-1443 539,-1424 2193,-1412 2263,-1411 1108,-1403 1173,-1395 2031,-1394 2086,-1394 487,-1379 988,-1362 2265,-1341 195,-1328 735,-1291 781,-1289 689,-1288 164,-1278 760,-1216 1041,-1200 954,-1192 987,-1157 337,-1129 432,-1128 1849,-1103 1667,-1102 1774,-1101 1727,-1099 263,-1094 1609,-1094 1908,-1094 1956,-1089 340,-1070 428,-1059 271,-1033 1791,-1024 1853,-1021 1694,-1020 1916,-1020 1959,-1017 342,-1000 593,-990 248,-971 428,-965 1850,-963 1932,-963 346,-941 1376,-936 1073,-933 1475,-933 1202,-916 430,-899 266,-887 1086,-886 1171,-882 346,-877 619,-877 811,-864 745,-859 429,-845 275,-829 683,-810 346,-809 953,-800 1019,-799 1097,-797 785,-796 876,-794 1363,-783 1169,-776 1296,-772 1056,-735 347,-732 690,-732 1012,-723 1804,-722 1666,-721 1144,-716 1891,-715 783,-708 891,-708 1178,-680 935,-677 216,-672 1105,-658 1858,-654 1585,-653 834,-652 1717,-652 387,-649 464,-647 243,-645 536,-645 625,-644 722,-641 1174,-611 1671,-605 1803,-605 783,-604 1859,-602 55,-581 1294,-551 536,-549 855,-545 1593,-545 1720,-542 1109,-541 1174,-539 481,-537 1856,-536 814,-533 1027,-529 51,-526 346,-522 1246,-521 536,-491 1671,-490 1860,-489 1801,-488 1296,-485 483,-484 577,-475 57,-463 648,-447 467,-446 1590,-439 536,-435 597,-429 1935,-429 1723,-423 60,-406 656,-382 595,-378 65,-369 1526,-347 648,-332 619,-323 1234,-278 1191,-277 633,-276 1149,-274 933,-271 1025,-271 1063,-271 1103,-271 982,-269 889,-268 296,-267 846,-267 343,-266 58,-260 676.13,-250.5 813,-245 1234,-235 420,-228 699,-227 1012,-220 815,-207 64,-204 1233,-199 633,-196 1511,-193 720,-188 571,-186 1004,-175 1597,-163 815,-162 1234,-155 426,-150 820,-127 856,-127 481,-126 906,-126 957,-126 1002,-126 1047,-126 1100,-126 1206,-126 1565,-126 1155,-124 388,-110 1520,-96 145,-93 437,-63 496,-63 372,-50 184,-48 312,-47 246,-46
CS: U3.50 U16.7 | length 1047.6
  Top Layer w6: U16.7@149.88,-1036 91.09,-1036 47.44,-1079.65 47.44,-1703.19 69.21,-1724.96 286.85,-1724.96 297.98,-1736.09 U3.50@297.98,-1775.43
DM: T2.1 U2.26 | length 153.7
  Top Layer w8: T2.1@1818.94,-116.69 1838.31,-136.06 1838.31,-169.25 1828.31,-179.25 U2.26@1828.31,-258.27
DP: T3.1 U2.25 | length 153.2
  Top Layer w8: U2.25@1871.61,-258.27 1871.61,-183.94 1860.59,-172.91 1860.59,-133.71 T3.1@1877.6,-116.69
DTR: Q7.3 R32.1 U2.6 | length 1322.2
  Top Layer w10: v1(1741.69,-931.57) U2.6@1741.69,-884.25
  Bottom Layer w10: Q7.3@677.63,-959.09 678,-958.72 R32.1@678,-905 678,-862.55 713.19,-827.36 1719.72,-827.36 1742.17,-849.8 1742.17,-888.98 ; v1(1741.69,-931.57) 1742.17,-931.1 1742.17,-888.98 ; 1742.17,-897.13 1742.17,-888.98
EN_3V8: R52.2 U3.2 U19.2 | length 1057.7
  Top Layer w10: U3.2@672,-1657.32 v1(752.08,-1657.32) ; U19.2@1360,-1630.57 1360,-1617 1379,-1598 1405,-1598 v1(1415,-1608)
  Bottom Layer w10: v1(752.08,-1657.32) 1172.57,-1657.32 1301.26,-1528.62 1353.15,-1528.62 ; R52.2@1345.63,-1568 1345.63,-1536.14 1353.15,-1528.62 ; v1(1415,-1608) 1443,-1608 1451,-1600 1451,-1543 1436.62,-1528.62 1353.15,-1528.62
EN_5V: R38.2 U3.45 U18.C1 | length 2294.9
  Top Layer w8: U3.45@179.87,-1617.94 v1(235.56,-1617.94)
  Top Layer w10: U18.C1@1370.87,-1946.25 v1(1370.87,-1911.8)
  Bottom Layer w8: v1(235.56,-1617.94) 235.56,-1958 269.56,-1992 434.66,-1992 468.66,-2026 468.66,-2321.61 485.67,-2338.62 1067.68,-2338.62 1099.17,-2307.13 1099.17,-2099.13 1123.5,-2074.8 1196.57,-2074.8 1230.51,-2040.87 1230.51,-1924.06 1242.76,-1911.8 v1(1370.87,-1911.8) ; v1@235.56,-1617.8 v1@235.71,-1617.8
  Bottom Layer w10: v1(1370.87,-1911.8) 1385,-1925.93 R38.2@1385,-1937.28
EN_5V1: R37.2 U3.54 | length 641.1
  Top Layer w10: U3.54@376.72,-1775.43 376.72,-1830.15 v1(392.81,-1846.23)
  Bottom Layer w10: v1(392.81,-1846.23) 423.14,-1815.91 865.87,-1815.91 914.96,-1766.81 R37.2@923.58,-1766.81
EN_5V2: R51.2 U3.53 | length 855.7
  Top Layer w10: U3.53@357.04,-1775.43 357.04,-1850.31 v1(383.82,-1877.09)
  Bottom Layer w10: v1(383.82,-1877.09) 410.98,-1877.09 455.87,-1832.2 714.36,-1832.2 924.88,-1832.2 948.23,-1855.55 R51.2@1098.46,-1855.55
GPS_RXD: Q21.3 R47.1 U2.62 | length 1915.8
  Top Layer w10: U2.62@1736.15,-362.56 v1(1736.15,-334.42) ; R47.1@1953,-1357 1941.8,-1357 1929.57,-1344.77 Q21.3@1929.57,-1260.63 v1(2135.39,-1260.63)
  Bottom Layer w10: v1(1736.15,-334.42) 1766.24,-304.33 2214.09,-304.33 2251.45,-341.69 2268.15,-358.39 2268.15,-1204.96 2212.48,-1260.63 v1(2135.39,-1260.63)
GPS_TXD: Q19.2 U2.61 | length 1762.5
  Top Layer w10: U2.61@1791.27,-362.56 v1(1791.27,-333.58) ; Q19.2@1820,-1209.26 1847.63,-1209.26 1862.99,-1193.9 2125.43,-1193.9 v1(2159.02,-1227.48)
  Bottom Layer w10: v1(1791.27,-333.58) 1897.24,-333.58 2194.96,-333.58 2245.35,-383.98 2245.35,-1175.32 2193.19,-1227.48 v1(2159.02,-1227.48)
MDTR: Q7.2 U3.21 | length 334.6
  Top Layer w6: U3.21@494.83,-1283.3 494.83,-1238.67 ; v1(605.39,-1057.56) 605.39,-1114.37 582.44,-1137.32 530.98,-1137.32 494.87,-1173.43 494.87,-1238.63 ; 494.83,-1238.67 494.87,-1238.63
  Bottom Layer w6: v1(605.39,-1057.56) 605.44,-1057.51 Q7.2@638.26,-1057.51
MISO: U3.44 U16.8 | length 633.7
  Top Layer w6: U16.8@149.88,-1086 149.88,-1150.12 71.5,-1228.5 71.5,-1565.08 104.68,-1598.26 U3.44@179.87,-1598.26
MOSI: U3.57 U16.15 | length 1090
  Top Layer w6: v1(424.02,-1703.9) 424.02,-1723.9 435.78,-1735.66 U3.57@435.78,-1775.43 ; v1(424.02,-1190.94) 405.47,-1172.4 405.47,-814.45 433.92,-786 U16.15@510.12,-786
  Bottom Layer w6: v1(424.02,-1703.9) v1(424.02,-1190.94)
MRI: Q6.3 R30.1 U3.22 | length 672.7
  Top Layer w10: U3.22@475.15,-1283.3 475.15,-1228.87 v1(476.77,-1227.24)
  Bottom Layer w10: v1(476.77,-1227.24) 506.46,-1197.56 702.38,-1197.56 736.38,-1163.56 736.38,-1103.43 753.23,-1086.57 753.23,-984.29 778.43,-959.09 Q6.3@827.8,-959.09 827.8,-938.35 839,-927.14 R30.1@839,-905
NBIOT_GRXD: Q19.3 R43.1 U3.17 | length 1439.6
  Top Layer w10: U3.17@573.57,-1283.3 v1(604.32,-1283.3) ; v1(643.31,-1348.94) 657.6,-1334.65 v1(736.34,-1334.65) ; v1@1146.93,-1426.97 1434.02,-1426.97 1465.24,-1395.75 ; 1465.24,-1397.48 1465.24,-1395.75 ; 1694,-1250.31 1673.71,-1250.31 ; Q19.3@1721.57,-1248.63 1719.9,-1250.31 1673.71,-1250.31 ; 1465.24,-1395.75 1465.24,-1330.28 1545.2,-1250.31 R43.1@1660,-1250.31 1673.71,-1250.31
  Bottom Layer w10: v1(604.32,-1283.3) 604.32,-1309.95 v1(643.31,-1348.94) ; v1(736.34,-1334.65) 736.34,-1375.98 774.41,-1414.06 987.84,-1414.06 ; 1007.13,-1414.06 987.84,-1414.06 ; v1(1146.93,-1427.13) 1114.57,-1459.49 1083.19,-1459.49 1037.76,-1414.06 987.84,-1414.06
NBIOT_GTXD: Q21.2 U3.16 | length 1641.8
  Top Layer w10: U3.16@672,-1381.72 731.07,-1381.72 v1(775.94,-1336.85) v1@775.94,-1336.54 ; v1@1080.35,-1426.97 1105.04,-1451.65 1448.74,-1451.65 1487.44,-1412.95 1487.44,-1361.62 ; 1487.44,-1394.13 1487.44,-1361.62 ; 1694,-1293.61 1684.86,-1293.61 ; Q21.2@2028,-1221.26 1876.85,-1221.26 1841.89,-1256.22 1796.26,-1256.22 1758.87,-1293.61 1684.86,-1293.61 ; 1487.44,-1361.62 1487.44,-1342.52 1536.35,-1293.61 1664.93,-1293.61 1684.86,-1293.61
  Bottom Layer w10: v1(775.94,-1336.85) 775.94,-1368.7 803.7,-1396.46 976.14,-1396.46 ; 998.9,-1396.46 976.14,-1396.46 ; v1(1080.08,-1426.69) 1049.84,-1396.46 976.14,-1396.46
NBIOT_NRXD: Q18.3 R42.1 U3.59 | length 1324.4
  Top Layer w10: U3.59@475.15,-1775.43 475.15,-1708.59 479.68,-1704.06 479.68,-1546.5 589.3,-1436.88 589.3,-1331.44 631.3,-1289.45 631.3,-946.38 672.68,-905 R42.1@983,-905 983,-965.94 Q18.3@983.63,-966.57
NBIOT_NTXD: Q20.2 U3.58 | length 1186
  Top Layer w10: U3.58@455.46,-1775.43 455.46,-1671.19 v1(455.75,-1670.91)
  Bottom Layer w10: v1(455.75,-1670.91) 455.75,-1308.94 535.12,-1229.57 702.32,-1229.57 751.77,-1180.12 751.77,-1118.27 778.19,-1091.85 814.8,-1091.85 829.88,-1076.77 829.88,-1038.98 870.83,-998.03 921.46,-998.03 938.59,-1015.17 Q20.2@938.59,-1057.51
NET: J1.1 U2.32 | length 188.8
  Top Layer w20: J1.1@1465.04,-130 1468.47,-130 cw(c1468.47,-230) 1568.47,-230 U2.32@1568.47,-258.27
NET_LIGHT: LED1.1 U2.41 | length 1328.9
  Top Layer w10: LED1.1@720.94,-143.75 720.94,-96.82 759.29,-58.46 1245.35,-58.46 1285.12,-98.23 v1(1285.12,-247.04)
  Top Layer w20: v1(1362.6,-701.18) U2.41@1412.95,-701.18
  Bottom Layer w20: v1(1285.12,-247.04) 1362.6,-324.52 v1(1362.6,-701.18)
NetBATT_2: BATT.2 R7.2 U3.1 | length 195.4
  Top Layer w20: v1(619.96,-1737.2) 654.09,-1737.2 672,-1719.29 672,-1685
  Bottom Layer w20: BATT.2@575.5,-1740 578.3,-1737.2 v1(619.96,-1737.2) 662.43,-1737.2 R7.2@672,-1727.63
NetC3_1: C3.1 R2.2 R5.1 U3.8 | length 224.3
  Top Layer w10: U3.8@672,-1539.2 718.73,-1539.2 v1(720.94,-1537)
  Bottom Layer w10: C3.1@643,-1441 643,-1488.37 R5.1@642.37,-1489 642.37,-1536.37 R2.2@643,-1537 v1(720.94,-1537)
NetC4_2: C4.2 R1.1 U3.5 Y2.1 | length 449.3
  Top Layer w6: U3.5@672,-1598.26 736.31,-1598.26 782.09,-1552.48 782.09,-1530.83 790.91,-1522 R1.1@821,-1522 847.72,-1522 864.76,-1504.96 918.12,-1504.96 Y2.1@961.46,-1548.31 999.76,-1548.31 1020.12,-1527.95 C4.2@1043.62,-1527.95